# Altium PCB gY-950A20200704V1.PcbDoc (part 3 of 5)
Units mm, origin at the board's own origin, x right, y up, seen from the top; angles counter-clockwise.
Board outline 59.48 x 100.3 mm, 2 copper layers (Top Layer, Bottom Layer), stack 0.193 mm thick; 144 components, 124 nets, 550 pads, 234 vias.
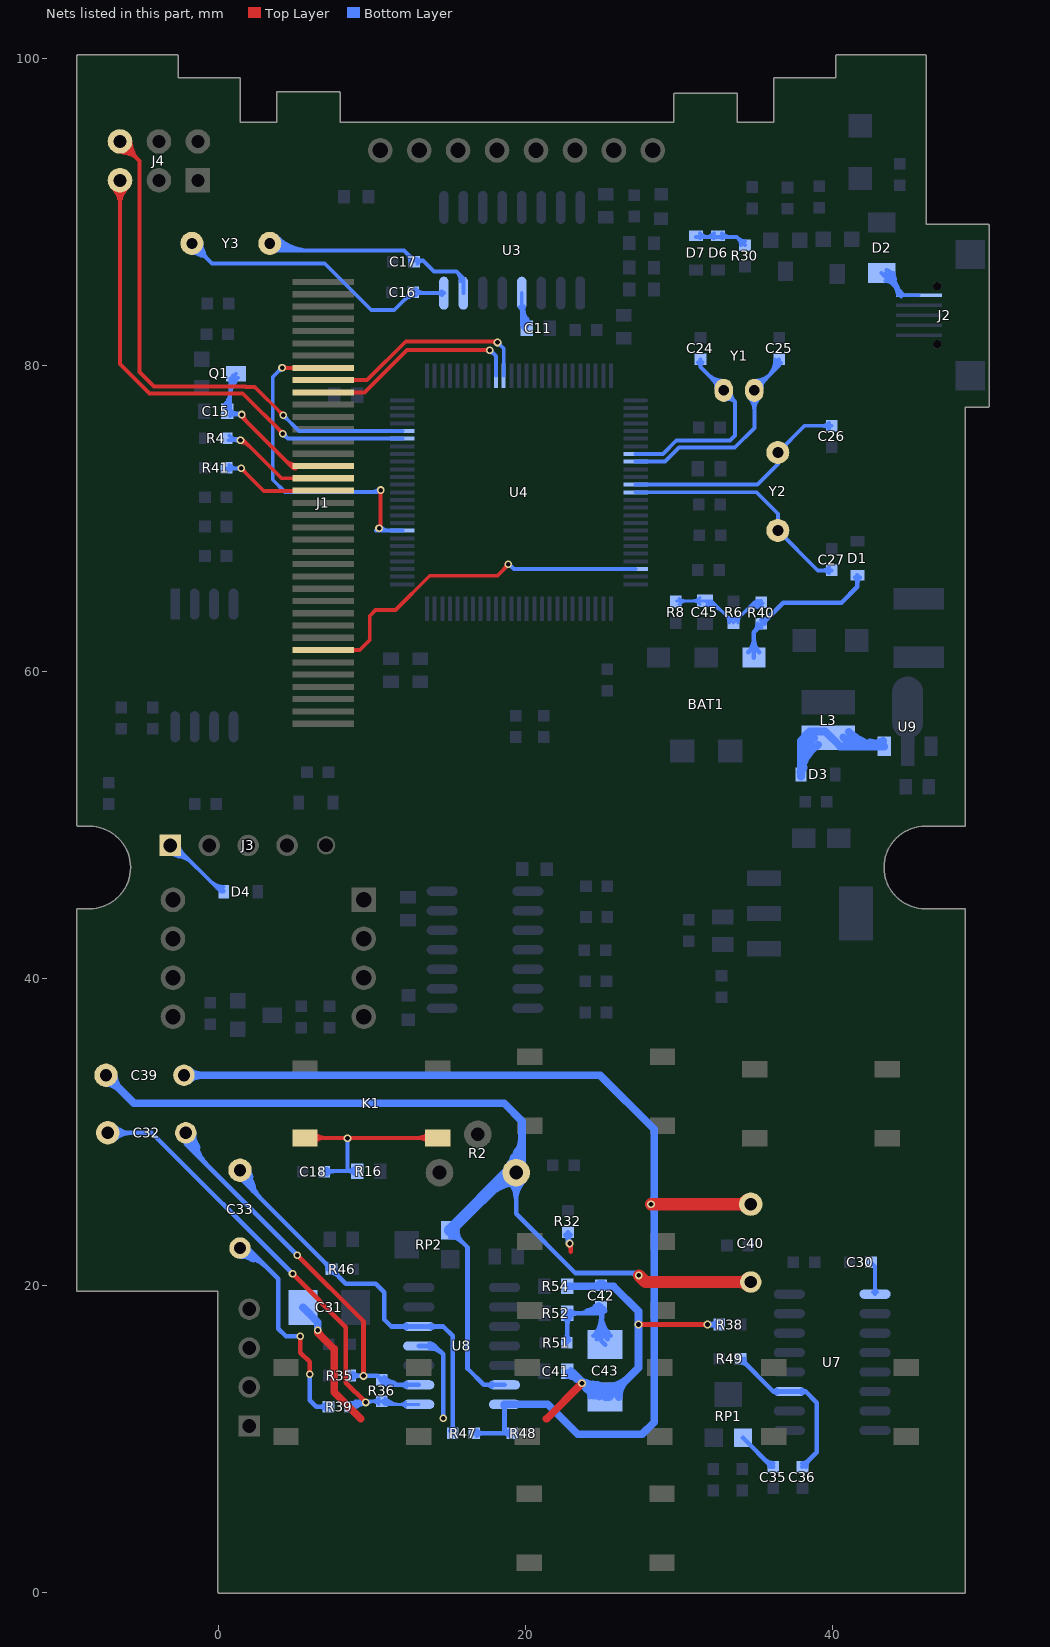
[diagram p3: the nets of this part, all layers, seen from the top]

## Via types
v1: diameter 0.5, hole 0.3, Top Layer to Bottom Layer, tented both sides, 234 vias

## Nets (pads, with @x,y where several pads share a name; then routed paths per layer and width w, separated by ;. In a path a pad name is that pad's centre, name@x,y a point inside that pad or via, vN(x,y) a via of type N, cw(c..) or ccw(c..) an arc to the next point about the centre after c; other vN are vias at no path point) (continued)
LCD_RD: J1.10 U4.85 | length 15.8
  Top Layer w0.25: J1.10@6.807,78.225 9.493,78.225 12.255,80.988 17.64,80.988 17.653,81.001 v1(17.653,80.975) ; 17.321,80.988 cw(c17.321,80.643) 17.565,80.887 ccw(c17.321,80.643) 17.321,80.988 ; 17.382,80.988 ccw(c17.382,81.246) 17.565,81.064 cw(c17.382,81.246) 17.382,80.988
  Bottom Layer w0.25: v1(17.653,80.975) 17.653,81.001 18.066,80.587 U4.85@18.066,79.312 ; v1@17.653,80.85 cw(c17.653,80.487) 17.91,80.744 ccw(c17.653,80.487) v1@17.653,80.85 ; v1@17.778,80.975 ccw(c18.018,80.975) 17.848,80.805 cw(c18.018,80.975) v1@17.778,80.975
LCD_RESET: J1.31 U4.23 | length 25.1
  Top Layer w0.25: J1.31@6.807,61.425 9.177,61.425 9.83,62.078 9.83,63.652 10.211,64.033 11.506,64.033 13.741,66.269 18.161,66.269 v1@18.923,67.031 ; 18.623,66.73 ccw(c18.323,67.031) 18.747,67.031 cw(c18.323,67.031) 18.623,66.73
  Bottom Layer w0.25: v1@18.923,67.031 19.241,66.712 U4.23@27.166,66.712 ; v1@18.872,66.906 cw(c18.872,66.481) 19.172,66.781 ccw(c18.872,66.481) v1@18.872,66.906
  other v1: 18.872,67.031
LCD_RS: J1.8 U4.58 | length 25.6
  Top Layer w0.25: v1(4.115,79.832) 4.122,79.825 J1.8@6.807,79.825 ; v1(10.439,69.367) 10.541,69.469 v1(10.541,71.857) ; v1@10.453,71.768 cw(c10.239,71.555) 10.541,71.555 cw(c10.843,71.555) v1@10.629,71.768 ; v1@4.203,79.744 cw(c4.4,79.547) 4.4,79.825 ccw(c4.4,79.547) v1@4.203,79.744 ; v1@4.203,79.921 ccw(c4.433,80.151) 4.433,79.825 cw(c4.433,80.151) v1@4.203,79.921
  Bottom Layer w0.25: v1(4.115,79.832) 3.505,79.223 3.505,72.534 4.31,71.73 10.414,71.73 v1(10.541,71.857) ; 9.933,71.73 ccw(c9.933,72.465) v1@10.453,71.945 ; 10.239,69.212 v1@10.439,69.212 ; v1(10.439,69.367) 10.595,69.212 U4.58@11.966,69.212 ; v1@10.528,69.456 ccw(c11.116,70.044) 11.116,69.212 ; 3.901,79.619 cw(c4.115,79.405) 4.115,79.707 ccw(c4.115,79.405) 3.901,79.619 ; 3.901,79.619 ccw(c3.688,79.832) 3.99,79.832 cw(c3.688,79.832) 3.901,79.619
LCD_WR: J1.9 U4.86 | length 16.6
  Top Layer w0.25: J1.9@6.807,79.025 9.652,79.025 12.18,81.553 18.091,81.553 v1(18.161,81.483) ; 17.69,81.553 cw(c17.69,81.012) 18.073,81.395 ccw(c17.69,81.012) 17.69,81.553
  Bottom Layer w0.25: v1(18.161,81.483) 18.566,81.078 U4.86@18.566,79.312 ; 18.374,81.27 cw(c18.588,81.483) 18.286,81.483 ccw(c18.588,81.483) 18.374,81.27 ; 18.374,81.27 ccw(c18.161,81.056) 18.161,81.358 cw(c18.161,81.056) 18.374,81.27
MCU_DM-: J4.5 U4.70 | length 42.6
  Top Layer w0.25: J4.5@-6.452,92.05 -6.452,80.086 -4.521,78.156 1.549,78.156 v1(4.166,75.54) ; -6.452,90.42 cw(c-4.822,90.42) -5.974,91.572 ccw(c-4.822,90.42) -6.452,90.42 ; -6.452,90.42 ccw(c-8.081,90.42) -6.929,91.572 cw(c-8.081,90.42) -6.452,90.42 ; -6.452,91.024 cw(c-5.426,91.024) -6.151,91.749 ccw(c-5.426,91.024) -6.452,91.024 ; -6.452,91.024 ccw(c-7.478,91.024) -6.752,91.749 cw(c-7.478,91.024) -6.452,91.024 ; 3.952,75.753 cw(c3.739,75.54) 4.041,75.54 ccw(c3.739,75.54) 3.952,75.753 ; 3.952,75.753 ccw(c4.166,75.966) 4.166,75.665 cw(c4.166,75.966) 3.952,75.753
  Bottom Layer w0.25: v1(4.166,75.54) 4.493,75.212 U4.70@11.966,75.212 ; 4.379,75.326 cw(c4.592,75.54) 4.291,75.54 ccw(c4.592,75.54) 4.379,75.326 ; 4.379,75.326 ccw(c4.166,75.113) 4.166,75.415 cw(c4.166,75.113) 4.379,75.326
MCU_DP+: J4.6 U4.71 | length 49.1
  Top Layer w0.25: J4.6@-6.77,94.524 ccw(c-5.872,94.708) -6.109,93.823 ; J4.6@-6.525,94.575 ccw(c-5.429,94.799) -5.718,93.718 ; J4.6@-6.452,94.59 -5.182,93.32 -5.182,79.553 -4.238,78.609 1.737,78.609 1.759,78.588 2.337,78.588 v1(4.191,76.733) ; J4.6@-6.437,94.663 cw(c-6.661,93.567) -5.58,93.856 ; J4.6@-6.386,94.908 cw(c-6.57,94.01) -5.685,94.247 ; -5.726,93.864 cw(c-5.001,94.59) -6.027,94.59 ccw(c-5.001,94.59) -5.726,93.864 ; -5.726,93.864 ccw(c-6.452,93.139) -6.452,94.165 cw(c-6.452,93.139) -5.726,93.864 ; -5.299,93.437 cw(c-4.147,94.59) -5.777,94.59 ccw(c-4.147,94.59) -5.299,93.437 ; -5.299,93.437 ccw(c-6.452,92.285) -6.452,93.915 cw(c-6.452,92.285) -5.299,93.437 ; 3.978,76.947 cw(c3.764,76.733) 4.066,76.733 ccw(c3.764,76.733) 3.978,76.947 ; 3.978,76.947 ccw(c4.191,77.16) 4.191,76.858 cw(c4.191,77.16) 3.978,76.947
  Bottom Layer w0.25: v1@4.14,76.784 v1(4.191,76.733) 5.212,75.712 U4.71@11.966,75.712 ; 4.404,76.52 cw(c4.618,76.733) 4.316,76.733 ccw(c4.618,76.733) 4.404,76.52 ; 4.404,76.52 ccw(c4.191,76.307) 4.191,76.608 cw(c4.191,76.307) 4.404,76.52
MGND: C31.2 C41.1 C42.1 C43.2 R32.1 R38.2 R54.1 U8.11 | length 108.4
  Top Layer w0.3: 22.936,22.2 v1@22.936,22.657 ; v1(27.356,17.45) v1(31.852,17.45) ; v1@22.789,22.662 cw(c22.435,22.308) 22.936,22.308 ccw(c22.435,22.308) v1@22.789,22.662
  Top Layer w0.5: 9.246,11.303 7.515,13.034 7.515,15.85 6.452,16.913 v1(6.452,17.069) ; 21.361,11.303 v1(23.673,13.614) ; v1(6.452,17.069) ccw(c6.829,17.069) 6.562,16.802 cw(c6.829,17.069) v1(6.452,17.069)
  Bottom Layer w0.3: U8.11@13.03,16.053 14.076,16.053 ; U8.11@13.875,16.13 ccw(c14.641,16.572) 14.412,15.718 ; v1(14.63,11.328) 14.63,15.499 14.076,16.053 ; R32.1@22.643,23.27 cw(c22.474,22.978) 22.8,23.065 ; C41.1@22.679,14.295 ccw(c23.155,14.456) C41.1@23.025,13.971 ; C41.1@22.687,14.28 ccw(c23.247,14.765) 23.194,14.027 ; v1@22.758,22.835 R32.1@22.758,23.47 ; v1@22.785,22.799 ccw(c22.642,22.924) 22.806,23.019 ; 22.808,23.034 cw(c23.035,23.095) R32.1@22.896,23.284 ; 23.239,13.831 cw(c23.092,13.279) v1@23.586,13.564 ; 23.357,13.981 ccw(c23.855,14.26) v1@23.7,13.711 ; 23.386,13.978 ccw(c23.852,14.207) v1@23.702,13.71 ; 23.457,14.048 ccw(c24.008,14.196) v1@23.723,13.701 ; v1@23.623,13.528 cw(c23.337,13.033) 23.889,13.181 ; v1@23.647,13.518 cw(c23.502,12.975) 23.988,13.256 ; v1@23.648,13.517 cw(c23.513,12.984) 23.989,13.259 ; v1@23.701,13.519 cw(c23.981,12.586) C43.2@24.443,13.443 ; v1@23.753,13.674 ccw(c23.904,13.784) 23.961,13.607 ; v1@23.769,13.643 ccw(c24.06,13.73) 23.916,13.463 ; v1@23.782,13.799 cw(c23.335,11.914) C43.2@25.077,12.764 ; v1@23.844,13.461 ccw(c24.24,13.858) C43.2@24.548,13.389 ; 23.892,13.475 cw(c23.6,12.243) C43.2@24.798,12.655 ; 23.905,13.4 cw(c23.225,12.72) C43.2@24.187,12.72 ; 23.957,13.396 cw(c24.159,13.745) v1@23.769,13.64 ; C43.2@24.104,13.2 ccw(c24.447,13.543) C43.2@24.713,13.138 ; C43.2@24.339,13.636 cw(c24.419,12.09) C43.2@25.455,13.24 ; C43.2@24.399,13.653 cw(c24.072,12.273) C43.2@25.346,12.895 ; C43.2@25.177,12.72 24.411,12.72 C41.1@22.72,14.41 ; v1(31.852,17.45) R38.2@32.614,17.45 ; 14.076,16.053 cw(c14.076,16.338) 13.859,16.153 ccw(c14.076,16.338) 14.076,16.053 ; 14.076,16.053 ccw(c14.076,15.768) 13.859,15.952 cw(c14.076,15.768) 14.076,16.053 ; 22.715,23.074 ccw(c23.119,23.182) v1@22.91,22.82 ; 22.715,23.074 ccw(c23.119,23.182) v1@22.91,22.82 ; 22.715,23.074 ccw(c23.119,23.182) v1@22.91,22.82 ; C41.1@22.72,14.41 ccw(c24.875,16.564) 24.963,13.519 cw(c24.875,16.564) C41.1@22.72,14.41 ; C41.1@22.72,14.41 23.131,14.41 ; v1@22.758,22.912 cw(c23.316,22.912) 22.922,23.306 ccw(c23.316,22.912) v1@22.758,22.912 ; v1@22.758,22.912 ccw(c22.201,22.912) 22.595,23.306 cw(c22.201,22.912) v1@22.758,22.912 ; 23.131,14.41 cw(c23.131,14.611) 22.951,14.523 ccw(c23.131,14.611) 23.131,14.41 ; 23.131,14.41 ccw(c23.131,14.21) 22.951,14.298 cw(c23.131,14.21) 23.131,14.41 ; 23.131,14.41 v1@23.8,13.741 ; 23.198,14.089 cw(c22.795,13.391) v1@23.576,13.59 ; 23.198,14.089 cw(c22.795,13.391) v1@23.576,13.59 ; 23.198,14.089 cw(c22.795,13.391) v1@23.576,13.59 ; 23.285,14.028 cw(c22.907,13.462) v1@23.575,13.595 ; 23.285,14.028 cw(c22.907,13.462) v1@23.575,13.595 ; 23.285,14.028 cw(c22.907,13.462) v1@23.575,13.595 ; 23.37,13.795 ccw(c23.613,14.105) v1@23.661,13.714 ; 23.37,13.795 ccw(c23.613,14.105) v1@23.661,13.714 ; 23.37,13.795 ccw(c23.613,14.105) v1@23.661,13.714 ; v1@23.727,13.531 cw(c24.126,12.916) C43.2@24.279,13.633 ; v1@23.727,13.531 cw(c24.126,12.916) C43.2@24.279,13.633 ; v1@23.727,13.531 cw(c24.126,12.916) C43.2@24.279,13.633 ; v1@23.761,13.662 ccw(c24.125,13.857) 24.006,13.462 ; v1@23.761,13.662 ccw(c24.125,13.857) 24.006,13.462 ; v1@23.761,13.662 ccw(c24.125,13.857) 24.006,13.462 ; v1@23.769,13.64 ccw(c24.487,13.833) C43.2@24.115,13.189 ; v1@23.769,13.64 ccw(c24.487,13.833) C43.2@24.115,13.189 ; v1@23.769,13.64 ccw(c24.487,13.833) C43.2@24.115,13.189 ; v1@23.8,13.741 ccw(c22.987,12.929) 22.769,14.057 cw(c22.987,12.929) v1@23.8,13.741 ; C43.2@24.187,12.72 ccw(c23.645,12.72) 24.028,13.103 cw(c23.645,12.72) C43.2@24.187,12.72 ; v1@31.902,17.363 cw(c32.113,16.998) 32.222,17.405 ; v1@31.902,17.363 cw(c32.113,16.998) 32.222,17.405 ; v1@31.902,17.363 cw(c32.113,16.998) 32.222,17.405 ; v1@31.902,17.536 ccw(c32.113,17.902) 32.222,17.494 ; v1@31.902,17.536 ccw(c32.113,17.902) 32.222,17.494 ; v1@31.902,17.536 ccw(c32.113,17.902) 32.222,17.494 ; v1@32.056,17.45 cw(c32.056,16.892) 32.45,17.286 ccw(c32.056,16.892) v1@32.056,17.45 ; v1@32.056,17.45 ccw(c32.056,18.007) 32.45,17.613 cw(c32.056,18.007) v1@32.056,17.45 ; U8.11@13.741,15.898 cw(c13.741,14.715) 14.578,15.552 ccw(c13.741,14.715) U8.11@13.741,15.898 ; U8.11@13.741,16.198 cw(c13.741,15.74) 14.065,16.064 ccw(c13.741,15.74) U8.11@13.741,16.198 ; C41.1@22.712,14.352 cw(c22.858,13.598) 23.4,14.141 ccw(c22.858,13.598) C41.1@22.712,14.352 ; C41.1@22.72,14.052 cw(c22.72,13.188) 23.332,13.799 ccw(c22.72,13.188) C41.1@22.72,14.052 ; R32.1@22.758,23.22 ccw(c23.347,23.22) 22.931,22.804 cw(c23.347,23.22) R32.1@22.758,23.22 ; C41.1@22.781,14.06 cw(c22.995,13.17) 23.472,13.951 ccw(c22.995,13.17) C41.1@22.781,14.06 ; C41.1@22.97,14.369 ccw(c23.284,14.445) 23.115,14.169 cw(c23.284,14.445) C41.1@22.97,14.369 ; C41.1@22.977,14.309 ccw(c23.351,14.309) 23.086,14.045 cw(c23.351,14.309) C41.1@22.977,14.309 ; 23.212,13.919 ccw(c24.903,15.609) 24.972,13.219 cw(c24.903,15.609) 23.212,13.919 ; 23.235,13.896 ccw(c23.673,14.333) 23.673,13.714 cw(c23.673,14.333) 23.235,13.896 ; 23.322,14.219 cw(c22.718,13.614) 23.573,13.614 ccw(c22.718,13.614) 23.322,14.219 ; v1@23.704,13.427 ccw(c24.93,14.653) 24.981,12.92 cw(c24.93,14.653) v1@23.704,13.427 ; v1@23.773,13.614 ccw(c24.392,13.614) 23.954,13.177 cw(c24.392,13.614) v1@23.773,13.614
  Bottom Layer w0.5: C31.2@5.481,18.562 6.452,17.591 v1(6.452,17.069) ; R54.1@22.72,19.948 25.722,19.948 27.356,18.313 v1(27.356,17.45) 27.356,14.63 25.445,12.72 C43.2@25.177,12.72 ; 24.439,19.948 ccw(c24.439,20.491) 24.824,20.107 cw(c24.439,20.491) 24.439,19.948 ; C42.1@25.009,20.107 ccw(c25.393,20.491) 25.393,19.948 cw(c25.393,20.491) C42.1@25.009,20.107 ; C43.2@25.367,13.42 ccw(c25.367,15.299) 26.696,13.97 cw(c25.367,15.299) C43.2@25.367,13.42 ; C43.2@26.067,12.72 cw(c27.567,12.72) 26.506,13.781 ccw(c27.567,12.72) C43.2@26.067,12.72
  other v1: 22.86,22.733
NetBAT1_1: BAT1.1 D1.1 R40.2 | length 19.2
  Bottom Layer w0.3: BAT1.1@34.873,60.935 34.873,62.584 36.805,64.516 40.589,64.516 41.631,65.557 D1.1@41.631,66.297 ; 34.873,62.142 cw(c33.666,62.142) 34.519,61.288 ccw(c33.666,62.142) 34.873,62.142 ; 34.873,62.142 ccw(c36.08,62.142) 35.226,61.288 cw(c36.08,62.142) 34.873,62.142 ; 41.631,65.814 cw(c42.113,65.814) 41.772,66.155 ccw(c42.113,65.814) 41.631,65.814 ; 41.631,65.814 ccw(c41.148,65.814) 41.489,66.155 cw(c41.148,65.814) 41.631,65.814 ; 34.909,62.62 ccw(c34.384,63.144) 35.126,63.144 cw(c34.384,63.144) 34.909,62.62 ; R40.2@35.093,62.804 cw(c35.357,62.54) 35.357,62.913 ccw(c35.357,62.54) R40.2@35.093,62.804 ; R40.2@35.357,63.375 ccw(c35.357,64.117) 35.881,63.593 cw(c35.357,64.117) R40.2@35.357,63.375 ; R40.2@35.588,63.144 cw(c35.962,63.144) 35.697,63.409 ccw(c35.962,63.144) R40.2@35.588,63.144
NetC11_2: C11.2 U3.4 | length 12.8
  Bottom Layer w0.25: C11.2@19.744,82.614 U3.4@19.744,84.696 ; 19.795,83.061 cw(c19.368,82.814) C11.2@19.82,82.619 ; 19.802,83.048 ccw(c20.301,83.336) C11.2@20.152,82.78 ; C11.2@19.85,82.672 ccw(c19.312,83.057) 19.885,83.387 ; C11.2@20.053,82.526 ccw(c19.659,82.809) 20.079,83.051 ; 19.744,83.487 cw(c20.179,83.487) 19.872,83.794 ccw(c20.179,83.487) 19.744,83.487 ; 19.744,83.487 ccw(c19.31,83.487) 19.617,83.794 cw(c19.31,83.487) 19.744,83.487 ; U3.4@19.655,83.766 cw(c19.405,83.334) 19.887,83.463 ccw(c19.405,83.334) U3.4@19.655,83.766 ; C11.2@19.744,82.787 ccw(c20.358,82.787) 19.924,82.353 cw(c20.358,82.787) C11.2@19.744,82.787 ; 19.744,83.391 ccw(c20.962,83.391) 20.101,82.53 cw(c20.962,83.391) 19.744,83.391 ; U3.4@19.744,83.994 ccw(c21.565,83.994) 20.278,82.707 cw(c21.565,83.994) U3.4@19.744,83.994 ; 19.863,83.551 cw(c20.22,83.647) 19.9,83.832 ccw(c20.22,83.647) 19.863,83.551
NetC15_1: C15.1 J1.16 Q1.D | length 28.6
  Top Layer w0.25: v1(1.48,76.779) 1.48,76.652 4.707,73.425 J1.16@6.807,73.425 ; 4.682,73.587 cw(c4.571,73.173) J1.16@4.942,73.388 ; v1@1.605,76.779 ccw(c2.213,76.779) 1.783,76.349 cw(c2.213,76.779) v1@1.605,76.779 ; 4.366,73.766 ccw(c5.007,74.407) 5.007,73.5 cw(c5.007,74.407) 4.366,73.766 ; 4.793,73.339 ccw(c5.007,73.553) 5.007,73.25 cw(c5.007,73.553) 4.793,73.339
  Bottom Layer w0.25: 0.468,77.534 ccw(c0.749,77.371) C15.1@0.547,77.117 ; 0.613,77.785 ccw(c0.931,77.601) C15.1@0.702,77.313 ; Q1.D@0.763,79.134 cw(c0.676,79.005) 0.811,78.927 cw(c1.074,78.775) Q1.D@1.028,79.075 ; Q1.D@0.771,79.129 cw(c0.561,78.797) 0.901,78.6 ; Q1.D@0.905,79.34 cw(c0.7,79.017) 1.031,78.825 ; Q1.D@1.121,79.446 0.739,79.063 0.739,76.779 v1(1.48,76.779) ; 1.178,76.779 cw(c1.178,76.478) 1.391,76.691 ccw(c1.178,76.478) 1.178,76.779 ; 1.178,76.779 ccw(c1.178,77.081) 1.391,76.868 cw(c1.178,77.081) 1.178,76.779 ; 1.183,76.857 ccw(c1.263,77.154) v1@1.417,76.888 ; 1.183,76.857 ccw(c1.263,77.154) v1@1.417,76.888 ; 1.183,76.857 ccw(c1.263,77.154) v1@1.417,76.888 ; 1.192,76.855 cw(c1.115,76.569) v1@1.371,76.717 ; 1.192,76.855 cw(c1.115,76.569) v1@1.371,76.717 ; 1.192,76.855 cw(c1.115,76.569) v1@1.371,76.717 ; C15.1@0.328,77.292 ccw(c-0.664,78.284) 0.739,78.284 cw(c-0.664,78.284) C15.1@0.328,77.292 ; C15.1@0.505,77.115 ccw(c-0.06,77.68) 0.739,77.68 cw(c-0.06,77.68) C15.1@0.505,77.115 ; C15.1@0.726,76.691 cw(c0.94,76.477) 0.94,76.779 ccw(c0.94,76.477) C15.1@0.726,76.691 ; C15.1@0.726,77.089 ccw(c1.473,77.835) 1.473,76.779 cw(c1.473,77.835) C15.1@0.726,77.089 ; 0.739,77.979 cw(c2.438,77.979) 1.236,79.18 ccw(c2.438,77.979) 0.739,77.979 ; 0.739,78.583 cw(c1.834,78.583) 1.06,79.357 ccw(c1.834,78.583) 0.739,78.583
NetC16_1: C16.1 U3.8 Y3.1@-1.765,87.943 | length 34.4
  Bottom Layer w0.25: Y3.1@-1.888,87.918 ccw(c-0.917,88.117) -1.173,87.16 ; Y3.1@-1.765,87.943 -0.448,86.627 6.896,86.627 9.931,83.591 11.428,83.591 12.674,84.837 12.814,84.696 U3.8@14.664,84.696 ; Y3.1@-1.74,88.066 cw(c-1.939,87.095) -0.982,87.351 ; C16.1@12.295,84.403 ccw(c12.157,84.92) C16.1@12.668,84.763 ; -1.125,87.303 cw(c-0.485,87.943) -1.39,87.943 ccw(c-0.485,87.943) -1.125,87.303 ; -1.125,87.303 ccw(c-1.765,86.663) -1.765,87.568 cw(c-1.765,86.663) -1.125,87.303 ; -0.698,86.877 cw(c0.369,87.943) -1.14,87.943 ccw(c0.369,87.943) -0.698,86.877 ; -0.698,86.877 ccw(c-1.765,85.81) -1.765,87.318 cw(c-1.765,85.81) -0.698,86.877 ; 14.23,84.696 cw(c14.23,84.262) 14.537,84.569 ccw(c14.23,84.262) 14.23,84.696 ; 14.23,84.696 ccw(c14.23,85.13) 14.537,84.823 cw(c14.23,85.13) 14.23,84.696 ; 12.106,84.27 cw(c12.674,83.703) 12.674,84.505 ccw(c12.674,83.703) 12.106,84.27 ; 12.29,84.454 ccw(c11.984,84.761) 12.418,84.761 cw(c11.984,84.761) 12.29,84.454 ; C16.1@12.855,84.58 cw(c13.136,84.299) 13.136,84.696 ccw(c13.136,84.299) C16.1@12.855,84.58 ; C16.1@12.855,84.942 ccw(c13.448,85.535) 13.448,84.696 cw(c13.448,85.535) C16.1@12.855,84.942
NetC17_2: C17.2 U3.7 Y3.2@3.315,87.943 | length 35.6
  Bottom Layer w0.25: Y3.2@3.315,87.943 3.781,87.478 12.065,87.478 12.726,86.816 13.312,86.816 ; Y3.2@3.601,87.702 cw(c3.999,87.366) 4.259,87.817 ; Y3.2@3.77,87.515 cw(c4.02,87.28) 4.191,87.577 cw(c4.445,88.016) Y3.2@3.939,87.984 ; Y3.2@3.792,87.54 cw(c4.231,87.17) 4.518,87.667 ; U3.7@15.934,84.696 15.934,85.666 15.486,86.114 14.014,86.114 13.312,86.816 ; 13.312,86.816 ccw(c13.312,86.391) 12.946,86.609 cw(c13.312,86.391) 13.312,86.816 ; Y3.2@3.226,87.855 ccw(c4.138,88.766) 4.138,87.478 cw(c4.138,88.766) Y3.2@3.226,87.855 ; Y3.2@3.403,88.032 ccw(c4.741,89.37) 4.741,87.478 cw(c4.741,89.37) Y3.2@3.403,88.032 ; Y3.2@3.58,88.209 ccw(c5.345,89.973) 5.345,87.478 cw(c5.345,89.973) Y3.2@3.58,88.209 ; Y3.2@3.757,88.385 ccw(c5.948,90.577) 5.948,87.478 cw(c5.948,90.577) Y3.2@3.757,88.385 ; 12.235,87.307 cw(c11.668,86.74) 12.47,86.74 ccw(c11.668,86.74) 12.235,87.307 ; 12.419,87.123 ccw(c12.726,87.43) 12.726,86.996 cw(c12.726,87.43) 12.419,87.123 ; C17.2@12.907,86.921 ccw(c13.16,87.174) 13.16,86.816 cw(c13.16,87.174) C17.2@12.907,86.921 ; 15.49,86.11 cw(c14.851,85.471) 15.755,85.471 ccw(c14.851,85.471) 15.49,86.11
NetC18_1: C18.1 K1.3 K1.4 R16.1 | length 25.5
  Top Layer w0.254: K1.3@5.614,29.622 K1.4@14.264,29.622 ; 6.91,29.622 cw(c6.91,30.643) 6.188,29.921 ccw(c6.91,30.643) 6.91,29.622 ; 6.91,29.622 ccw(c6.91,28.601) 6.188,29.323 cw(c6.91,28.601) 6.91,29.622 ; 12.968,29.622 cw(c12.968,28.601) 13.69,29.323 ccw(c12.968,28.601) 12.968,29.622 ; 12.968,29.622 ccw(c12.968,30.643) 13.69,29.921 cw(c12.968,30.643) 12.968,29.622 ; 8.01,29.622 cw(c8.01,29.219) 8.295,29.504 ccw(c8.01,29.219) 8.01,29.622 ; v1@8.469,29.504 cw(c8.754,29.219) 8.754,29.622 ccw(c8.754,29.219) v1@8.469,29.504
  Bottom Layer w0.254: C18.1@6.898,27.449 R16.1@9.03,27.449 ; 8.382,27.5 v1(8.382,29.591) ; 8.355,27.449 cw(c8.355,26.774) 8.832,27.251 ccw(c8.355,26.774) 8.355,27.449 ; 8.355,27.449 ccw(c8.355,28.123) 8.832,27.646 cw(c8.355,28.123) 8.355,27.449 ; 8.382,29.294 cw(c8.679,29.294) 8.469,29.504 ccw(c8.679,29.294) 8.382,29.294 ; 8.382,29.294 ccw(c8.085,29.294) 8.295,29.504 cw(c8.085,29.294) 8.382,29.294 ; C18.1@7.037,27.228 cw(c7.57,26.695) 7.57,27.449 ccw(c7.57,26.695) C18.1@7.037,27.228 ; C18.1@7.037,27.587 ccw(c7.371,27.921) 7.371,27.449 cw(c7.371,27.921) C18.1@7.037,27.587
NetC24_2: C24.2 U4.8 Y1.1 | length 21.9
  Bottom Layer w0.25: U4.8@27.166,74.212 28.949,74.212 29.82,75.082 33.325,75.082 33.655,75.413 33.655,77.613 ; C24.2@31.393,80.39 31.393,79.875 ; 31.393,79.875 cw(c31.784,79.875) 31.548,80.186 ccw(c31.784,79.875) 31.393,79.875 ; 31.393,79.875 ccw(c31.003,79.875) 31.239,80.186 cw(c31.003,79.875) 31.393,79.875 ; 31.393,79.875 Y1.1@32.909,78.359 33.655,77.613 ; 33.655,77.613 ccw(c33.238,77.196) 33.055,77.757 cw(c33.238,77.196) 33.655,77.613 ; 31.842,79.426 ccw(c32.909,80.493) 32.909,78.984 cw(c32.909,80.493) 31.842,79.426 ; 32.204,79.064 cw(c31.649,78.509) 32.434,78.509 ccw(c31.649,78.509) 32.204,79.064 ; 32.269,78.999 ccw(c32.909,79.639) 32.909,78.734 cw(c32.909,79.639) 32.269,78.999 ; Y1.1@33.384,78.209 ccw(c34.169,78.209) 33.614,77.654 cw(c34.169,78.209) Y1.1@33.384,78.209
NetC25_2: C25.2 U4.9 Y1.2 | length 28.3
  Bottom Layer w0.25: U4.9@27.166,73.712 29.09,73.712 30.007,74.629 33.634,74.629 34.909,75.905 Y1.2@34.909,78.359 36.524,79.974 ; C25.2@36.314,80.244 cw(c35.945,79.987) 36.379,79.871 cw(c36.794,79.76) C25.2@36.625,80.155 ; C25.2@36.524,80.39 36.524,79.974 ; 34.909,77.062 cw(c36.056,77.062) 35.245,77.873 ccw(c36.056,77.062) 34.909,77.062 ; 34.909,77.062 ccw(c33.762,77.062) 34.573,77.873 cw(c33.762,77.062) 34.909,77.062 ; 36.524,79.974 cw(c36.734,79.974) 36.639,80.161 ccw(c36.734,79.974) 36.524,79.974 ; 36.524,79.974 ccw(c36.315,79.974) 36.409,80.161 cw(c36.315,79.974) 36.524,79.974 ; Y1.2@34.909,78.734 ccw(c34.909,79.639) 35.549,78.999 cw(c34.909,79.639) Y1.2@34.909,78.734 ; Y1.2@34.909,78.984 ccw(c34.909,80.493) 35.976,79.426 cw(c34.909,80.493) Y1.2@34.909,78.984 ; Y1.2@35.384,78.509 cw(c36.169,78.509) 35.614,79.064 ccw(c36.169,78.509) Y1.2@35.384,78.509 ; 35.793,79.243 ccw(c34.646,80.39) 36.268,80.39 cw(c34.646,80.39) 35.793,79.243 ; 36.22,79.67 ccw(c35.5,80.39) 36.518,80.39 cw(c35.5,80.39) 36.22,79.67
NetC26_2: C26.2 U4.12 Y2.2@36.44,74.308 | length 17.3
  Bottom Layer w0.25: U4.12@27.166,72.212 35.103,72.212 36.441,73.55 ; Y2.2@36.129,74.234 cw(c35.534,73.55) 36.441,73.55 ; Y2.2@36.752,74.234 ccw(c37.347,73.55) 36.441,73.55 ; C26.2@39.772,75.868 ccw(c39.335,75.431) 39.335,76.049 ccw(c39.335,76.667) C26.2@39.772,76.23 ; C26.2@39.953,76.049 38.181,76.049 Y2.2@36.44,74.308 36.441,73.55
NetC27_2: C27.2 U4.13 Y2.1@36.44,69.228 | length 16.5
  Bottom Layer w0.25: U4.13@27.166,71.712 35.044,71.712 36.441,70.316 36.441,69.228 39.045,66.623 C27.2@39.953,66.623 ; C27.2@39.772,66.442 ccw(c39.335,66.005) 39.335,66.623 ccw(c39.335,67.241) C27.2@39.772,66.804
NetC30_2: C30.2 U7.1 | length 3.6
  Bottom Layer w0.25: C30.2@42.521,21.513 42.781,21.253 U7.1@42.781,19.431 ; 42.781,19.865 cw(c42.347,19.865) 42.653,19.558 ccw(c42.347,19.865) 42.781,19.865 ; 42.781,19.865 ccw(c43.215,19.865) 42.908,19.558 cw(c43.215,19.865) 42.781,19.865
NetC32_1: C32.1 R36.1 R39.2 U8.8 | length 60.2
  Top Layer w0.3: v1(4.801,20.752) 8.28,17.272 8.28,13.665 v1(9.576,12.37)
  Bottom Layer w0.203: R39.2@8.534,12.09 8.89,12.446 R36.1@10.617,12.446 10.82,12.243 U8.8@13.03,12.243 ; R39.2@8.582,12.15 ccw(c8.861,12.502) 9.098,12.121 ; R39.2@8.646,12.347 ccw(c8.882,12.891) 9.178,12.377 ; R39.2@8.708,12.309 ccw(c9.051,12.743) 9.343,12.274 ; R39.2@8.804,12.018 cw(c9.213,11.909) 9.001,12.275 ; 9.185,12.226 ccw(c9.056,12.647) v1@9.445,12.44 ; 9.296,12.259 cw(c9.376,11.995) v1@9.506,12.239 ; R36.1@10.678,12.4 cw(c10.933,12.205) 11.093,12.483 ; R36.1@10.827,12.261 cw(c10.947,12.155) 11.028,12.294 cw(c11.166,12.533) R36.1@10.893,12.49 ; R36.1@10.839,12.276 cw(c11.118,12.064) 11.293,12.367 ; 9.04,12.302 cw(c9.197,11.714) v1@9.502,12.241 ; 9.04,12.302 cw(c9.197,11.714) v1@9.502,12.241 ; 9.04,12.302 cw(c9.197,11.714) v1@9.502,12.241 ; 9.233,12.196 cw(c9.422,11.848) v1@9.534,12.227 ; 9.233,12.196 cw(c9.422,11.848) v1@9.534,12.227 ; 9.233,12.196 cw(c9.422,11.848) v1@9.534,12.227 ; 9.279,12.221 ccw(c9.125,12.503) v1@9.433,12.412 ; 9.279,12.221 ccw(c9.125,12.503) v1@9.433,12.412 ; 9.279,12.221 ccw(c9.125,12.503) v1@9.433,12.412 ; v1@9.666,12.488 ccw(c9.862,12.744) 9.905,12.424 ; v1@9.666,12.488 ccw(c9.862,12.744) 9.905,12.424 ; v1@9.666,12.488 ccw(c9.862,12.744) 9.905,12.424 ; v1@9.694,12.28 cw(c10.006,12.041) 9.954,12.431 ; v1@9.694,12.28 cw(c10.006,12.041) 9.954,12.431 ; v1@9.694,12.28 cw(c10.006,12.041) 9.954,12.431 ; 9.943,12.446 cw(c9.943,11.771) 10.42,12.248 ccw(c9.943,11.771) 9.943,12.446 ; 9.943,12.446 ccw(c9.943,13.121) 10.42,12.644 cw(c9.943,13.121) 9.943,12.446 ; 11.828,12.243 cw(c11.828,11.752) 12.175,12.099 ccw(c11.828,11.752) 11.828,12.243 ; 11.828,12.243 ccw(c11.828,12.733) 12.175,12.386 cw(c11.828,12.733) 11.828,12.243 ; R39.2@8.445,12.18 cw(c9.086,11.539) 9.086,12.446 ccw(c9.086,11.539) R39.2@8.445,12.18 ; R39.2@8.588,12.037 cw(c9.577,11.048) 9.577,12.446 ccw(c9.577,11.048) R39.2@8.588,12.037 ; R39.2@8.732,11.893 cw(c10.067,10.557) 10.067,12.446 ccw(c10.067,10.557) R39.2@8.732,11.893 ; 9.034,12.446 cw(c9.034,11.828) 9.471,12.265 ccw(c9.034,11.828) 9.034,12.446 ; v1@9.681,12.265 cw(c10.118,11.828) 10.118,12.446 ccw(c10.118,11.828) v1@9.681,12.265 ; R36.1@10.671,12.5 ccw(c11.292,13.121) 11.292,12.243 cw(c11.292,13.121) R36.1@10.671,12.5 ; R36.1@10.815,12.644 ccw(c11.782,13.611) 11.782,12.243 cw(c11.782,13.611) R36.1@10.815,12.644
  Bottom Layer w0.3: C32.1@-7.244,29.948 -4.396,29.948 v1(4.801,20.752) ; -5.767,29.948 cw(c-5.767,31.426) -6.812,30.381 ccw(c-5.767,31.426) -5.767,29.948 ; -5.767,29.948 ccw(c-5.767,28.471) -6.812,29.515 cw(c-5.767,28.471) -5.767,29.948
NetC32_2: C32.2 R35.1 R36.2 U8.9 | length 49.9
  Top Layer w0.3: v1(5.105,21.971) 9.423,17.653 v1(9.423,14.097)
  Bottom Layer w0.3: C32.2@-2.268,29.721 cw(c-2.726,28.718) -1.661,29.003 ; C32.2@-2.218,29.401 cw(c-2.24,29.177) -2.023,29.235 cw(c-1.841,29.284) C32.2@-1.924,29.454 ; C32.2@-2.164,29.948 -2.164,29.241 ; C32.2@-2.139,29.992 cw(c-2.986,28.525) -1.351,28.963 ; -1.738,29.291 cw(c-1.252,29.422) C32.2@-1.688,29.673 ; v1(5.105,21.971) -2.164,29.241 ; R35.1@8.56,14.122 10.338,14.122 R36.2@10.617,13.843 10.947,13.513 U8.9@13.03,13.513 ; R36.2@10.677,13.62 cw(c10.762,13.301) R36.2@10.927,13.587 ; R36.2@10.729,13.641 cw(c11.071,13.023) 11.424,13.635 ; R36.2@10.848,13.844 ccw(c11.217,13.845) 11.032,13.526 ; -2.164,29.241 cw(c-1.985,29.241) -2.029,29.415 ccw(c-1.985,29.241) -2.164,29.241 ; -2.164,29.241 ccw(c-2.344,29.241) -2.3,29.415 cw(c-2.344,29.241) -2.164,29.241 ; 9.117,14.122 cw(c9.117,14.68) 8.723,14.286 ccw(c9.117,14.68) 9.117,14.122 ; 9.117,14.122 ccw(c9.117,13.565) 8.723,13.959 cw(c9.117,13.565) 9.117,14.122 ; 11.945,13.513 cw(c11.945,13.139) 12.21,13.403 ccw(c11.945,13.139) 11.945,13.513 ; 11.945,13.513 ccw(c11.945,13.886) 12.21,13.622 cw(c11.945,13.886) 11.945,13.513 ; C32.2@-2.214,29.948 ccw(c-0.627,29.948) -1.75,28.826 cw(c-0.627,29.948) C32.2@-2.214,29.948 ; C32.2@-1.914,29.948 ccw(c0.397,29.948) -1.237,28.314 cw(c0.397,29.948) C32.2@-1.914,29.948 ; C32.2@-1.614,29.948 ccw(c1.421,29.948) -0.725,27.802 cw(c1.421,29.948) C32.2@-1.614,29.948 ; 9.121,14.122 cw(c9.121,13.794) 9.353,14.026 ccw(c9.121,13.794) 9.121,14.122 ; v1@9.494,14.026 cw(c9.726,13.794) 9.726,14.122 ccw(c9.726,13.794) v1@9.494,14.026 ; R36.2@10.568,13.794 ccw(c11.248,14.474) 11.248,13.513 cw(c11.248,14.474) R36.2@10.568,13.794 ; R36.2@10.781,14.006 ccw(c11.972,15.198) 11.972,13.513 cw(c11.972,15.198) R36.2@10.781,14.006
NetC33_1: C33.1 R46.1 R47.2 U8.12 | length 46.5
  Bottom Layer w0.3: C33.1@1.289,27.213 cw(c1.034,26.307) 1.943,26.551 ; C33.1@1.368,27.503 cw(c0.679,26) 2.276,26.428 ; C33.1@1.373,27.514 1.373,27.024 R46.1@7.341,21.057 8.28,20.117 10.211,20.117 10.77,19.558 10.77,17.78 11.227,17.323 U8.12@13.03,17.323 14.63,17.323 15.24,16.713 R47.2@15.24,10.363 ; C33.1@1.493,27.775 cw(c1.024,26.753) 2.111,27.044 ; 1.858,26.867 cw(c2.292,26.983) C33.1@1.903,27.208 ; 6.946,21.451 cw(c6.552,21.057) 7.11,21.057 ccw(c6.552,21.057) 6.946,21.451 ; 6.946,21.451 ccw(c7.341,21.845) 7.341,21.288 cw(c7.341,21.845) 6.946,21.451 ; 7.735,20.662 cw(c8.129,21.057) 7.572,21.057 ccw(c8.129,21.057) 7.735,20.662 ; 7.735,20.662 ccw(c7.341,20.268) 7.341,20.826 cw(c7.341,20.268) 7.735,20.662 ; 11.945,17.323 cw(c11.945,16.949) 12.21,17.213 ccw(c11.945,16.949) 11.945,17.323 ; 11.945,17.323 ccw(c11.945,17.696) 12.21,17.432 cw(c11.945,17.696) 11.945,17.323 ; 14.115,17.323 cw(c14.115,17.696) 13.851,17.432 ccw(c14.115,17.696) 14.115,17.323 ; 14.115,17.323 ccw(c14.115,16.949) 13.851,17.213 cw(c14.115,16.949) 14.115,17.323 ; 15.24,10.921 cw(c14.682,10.921) 15.077,10.527 ccw(c14.682,10.921) 15.24,10.921 ; 15.24,10.921 ccw(c15.798,10.921) 15.403,10.527 cw(c15.798,10.921) 15.24,10.921 ; C33.1@1.385,27.514 ccw(c2.596,27.514) 1.74,26.657 cw(c2.596,27.514) C33.1@1.385,27.514 ; C33.1@1.685,27.514 ccw(c3.62,27.514) 2.252,26.145 cw(c3.62,27.514) C33.1@1.685,27.514 ; C33.1@1.985,27.514 ccw(c4.645,27.514) 2.764,25.633 cw(c4.645,27.514) C33.1@1.985,27.514
NetC33_2: C33.2 R39.1 | length 26.8
  Top Layer w0.3: v1(5.309,16.688) 5.309,15.621 5.918,15.011 v1(5.918,14.199)
  Bottom Layer w0.3: C33.2@1.328,22.412 ccw(c2.633,23.05) 2.257,21.647 ; C33.2@1.373,22.434 1.874,22.434 3.873,20.434 3.873,17.183 4.369,16.688 v1(5.309,16.688) ; C33.2@1.613,22.506 ccw(c2.367,22.733) 2.163,21.972 ; C33.2@1.648,21.957 cw(c1.9,21.521) 2.03,22.008 ; v1(5.918,14.199) 5.918,12.522 6.35,12.09 R39.1@7.137,12.09 ; 6.58,12.09 cw(c6.58,11.533) 6.974,11.927 ccw(c6.58,11.533) 6.58,12.09 ; 6.58,12.09 ccw(c6.58,12.648) 6.974,12.254 cw(c6.58,12.648) 6.58,12.09 ; C33.2@1.373,21.884 cw(c1.373,19.346) 3.167,21.14 ccw(c1.373,19.346) C33.2@1.373,21.884 ; C33.2@1.373,22.184 cw(c1.373,20.371) 2.655,21.653 ccw(c1.373,20.371) C33.2@1.373,22.184 ; C33.2@1.373,22.484 cw(c1.373,21.395) 2.143,22.165 ccw(c1.373,21.395) C33.2@1.373,22.484
NetC35_2: C35.2 RP1.1 | length 4.5
  Bottom Layer w0.3: RP1.1@34.167,10.061 36.048,8.18 C35.2@36.145,8.18 ; 35.586,8.643 ccw(c36.145,9.202) 36.145,8.411 cw(c36.145,9.202) 35.586,8.643 ; C35.2@35.819,8.409 cw(c35.59,8.18) 35.914,8.18 ccw(c35.59,8.18) C35.2@35.819,8.409
NetC36_2: C36.2 R49.2 U7.11 | length 16.3
  Bottom Layer w0.3: R49.2@34.011,15.215 36.144,13.081 ; C36.2@38.044,8.18 38.989,9.125 38.989,12.344 38.252,13.081 ; 34.405,14.82 cw(c34.799,15.215) 34.242,15.215 ccw(c34.799,15.215) 34.405,14.82 ; 34.405,14.82 ccw(c34.011,14.426) 34.011,14.984 cw(c34.011,14.426) 34.405,14.82 ; 36.144,13.081 cw(c36.144,12.791) 36.364,12.98 ccw(c36.144,12.791) 36.144,13.081 ; 36.144,13.081 ccw(c36.144,13.371) 36.364,13.182 cw(c36.144,13.371) 36.144,13.081 ; 36.144,13.081 U7.11@37.193,13.081 38.252,13.081 ; 38.252,13.081 cw(c38.252,13.396) 38.019,13.185 ccw(c38.252,13.396) 38.252,13.081 ; 38.252,13.081 ccw(c38.252,12.766) 38.019,12.977 cw(c38.252,12.766) 38.252,13.081 ; 38.438,8.574 cw(c38.044,8.968) 38.044,8.411 ccw(c38.044,8.968) 38.438,8.574 ; 38.438,8.574 ccw(c38.833,8.18) 38.275,8.18 cw(c38.833,8.18) 38.438,8.574
NetC39_1: C39.1 C40.2 R2.1 RP2.1 U8.6 | length 104.7
  Top Layer w0.8: v1(27.381,20.65) 27.812,20.219 C40.2@34.677,20.219 ; 33.953,20.219 cw(c33.953,19.495) 34.465,20.007 ccw(c33.953,19.495) 33.953,20.219 ; 33.953,20.219 ccw(c33.953,20.943) 34.465,20.431 cw(c33.953,20.943) 33.953,20.219
  Bottom Layer w0.3: RP2.1@15.085,23.601 16.205,22.48 16.205,14.58 17.272,13.513 U8.6@18.618,13.513 ; R2.1@19.38,27.559 19.38,24.663 23.235,20.809 27.223,20.809 v1(27.381,20.65) ; 27.008,20.754 ccw(c27.186,21.063) v1@27.339,20.741 ; 15.853,22.832 cw(c16.621,23.601) 15.535,23.601 ccw(c16.621,23.601) 15.853,22.832 ; 15.853,22.832 ccw(c15.085,22.064) 15.085,23.151 cw(c15.085,22.064) 15.853,22.832 ; 17.533,13.513 cw(c17.533,13.139) 17.798,13.403 ccw(c17.533,13.139) 17.533,13.513 ; 17.533,13.513 ccw(c17.533,13.886) 17.798,13.622 cw(c17.533,13.886) 17.533,13.513 ; 19.38,25.545 cw(c21.191,25.545) 19.911,26.825 ccw(c21.191,25.545) 19.38,25.545 ; 19.38,25.545 ccw(c17.57,25.545) 18.85,26.825 cw(c17.57,25.545) 19.38,25.545 ; 19.38,26.269 cw(c20.467,26.269) 19.698,27.038 ccw(c20.467,26.269) 19.38,26.269 ; 19.38,26.269 ccw(c18.294,26.269) 19.062,27.038 cw(c18.294,26.269) 19.38,26.269 ; 26.757,20.809 cw(c26.757,20.026) 27.31,20.579 ccw(c26.757,20.026) 26.757,20.809
  Bottom Layer w0.5: C39.1@-7.364,33.703 -5.538,31.877 18.593,31.877 19.761,30.709 R2.1@19.761,27.559 ; 19.229,28.35 ccw(c19.78,28.032) R2.1@19.457,27.485 ; 19.482,28.788 ccw(c20.038,28.467) R2.1@19.711,27.915 ; -6.49,32.829 cw(c-5.616,33.703) -6.852,33.703 ccw(c-5.616,33.703) -6.49,32.829 ; -6.49,32.829 ccw(c-7.364,31.955) -7.364,33.191 cw(c-7.364,31.955) -6.49,32.829 ; R2.1@18.921,27.815 ccw(c16.891,29.845) 19.761,29.845 cw(c16.891,29.845) R2.1@18.921,27.815 ; R2.1@19.274,27.462 ccw(c18.098,28.638) 19.761,28.638 cw(c18.098,28.638) R2.1@19.274,27.462
  Bottom Layer w0.8: RP2.1@15.085,23.601 19.043,27.559 R2.1@19.761,27.559 ; 17.604,26.12 cw(c19.38,24.345) 19.38,26.856 ccw(c19.38,24.345) 17.604,26.12
NetC39_2: C39.2 C40.1 R47.1 R48.2 U8.7 | length 86.7
  Top Layer w0.8: v1(28.169,25.299) C40.1@34.677,25.299 ; 33.803,25.299 cw(c33.803,24.425) 34.421,25.043 ccw(c33.803,24.425) 33.803,25.299 ; 33.803,25.299 ccw(c33.803,26.173) 34.421,25.555 cw(c33.803,26.173) 33.803,25.299
  Bottom Layer w0.3: R47.1@16.637,10.363 18.694,10.363 ; U8.7@18.618,12.243 18.618,10.439 18.694,10.363 ; 17.195,10.363 cw(c17.195,10.921) 16.8,10.527 ccw(c17.195,10.921) 17.195,10.363 ; 17.195,10.363 ccw(c17.195,9.806) 16.8,10.2 cw(c17.195,9.806) 17.195,10.363 ; 18.569,10.363 cw(c18.569,9.806) 18.963,10.2 ccw(c18.569,9.806) 18.569,10.363 ; 18.569,10.363 ccw(c18.569,10.921) 18.963,10.527 cw(c18.569,10.921) 18.569,10.363 ; 18.618,11.869 cw(c18.992,11.869) 18.728,12.133 ccw(c18.992,11.869) 18.618,11.869 ; 18.618,11.869 ccw(c18.244,11.869) 18.509,12.133 cw(c18.244,11.869) 18.618,11.869 ; 18.694,10.363 cw(c18.694,10.075) 18.934,10.235 ccw(c18.694,10.075) 18.694,10.363 ; 18.694,10.363 ccw(c18.694,10.651) 18.934,10.491 cw(c18.694,10.651) 18.694,10.363
  Bottom Layer w0.5: C39.2@-2.284,33.703 24.844,33.703 28.372,30.175 28.372,11.074 27.584,10.287 23.393,10.287 21.438,12.243 U8.7@18.618,12.243 ; -1.197,33.703 cw(c-1.197,34.789) -1.966,34.021 ccw(c-1.197,34.789) -1.197,33.703 ; -1.197,33.703 ccw(c-1.197,32.616) -1.966,33.384 cw(c-1.197,32.616) -1.197,33.703 ; v1(28.169,25.299) cw(c27.68,24.81) 28.372,24.81 ccw(c27.68,24.81) v1(28.169,25.299) ; v1(28.169,25.299) ccw(c27.68,25.788) 28.372,25.788 cw(c27.68,25.788) v1(28.169,25.299)
NetC42_2: C42.2 C43.1 R51.2 R52.2 | length 34.4
  Bottom Layer w0.3: R51.2@22.682,16.256 22.72,16.294 R52.2@22.72,18.178 24.679,18.178 ; 23.942,18.312 cw(c24.486,17.369) C42.2@24.841,18.399 ; 24.334,18.204 ccw(c23.95,18.868) C42.2@24.693,18.675 ; 24.512,18.641 cw(c24.77,18.194) C42.2@24.939,18.682 ; C42.2@24.606,18.361 cw(c24.771,18.075) C42.2@24.857,18.394 ; C43.1@25.177,16.14 24.916,16.4 24.916,18.415 24.679,18.178 ; 22.72,17.457 cw(c23.339,17.457) 22.902,17.895 ccw(c23.339,17.457) 22.72,17.457 ; 22.72,17.457 ccw(c22.101,17.457) 22.539,17.895 cw(c22.101,17.457) 22.72,17.457 ; 23.339,18.178 cw(c23.339,18.797) 22.902,18.359 ccw(c23.339,18.797) 23.339,18.178 ; 23.339,18.178 ccw(c23.339,17.559) 22.902,17.996 cw(c23.339,17.559) 23.339,18.178 ; 24.679,18.178 ccw(c24.494,18.363) 24.718,18.498 cw(c24.494,18.363) 24.679,18.178 ; 24.916,18.06 cw(c25.474,18.06) 25.08,18.454 ccw(c25.474,18.06) 24.916,18.06 ; 24.916,18.06 ccw(c24.359,18.06) 24.753,18.454 cw(c24.359,18.06) 24.916,18.06 ; R51.2@22.519,16.419 ccw(c22.033,16.905) 22.72,16.905 cw(c22.033,16.905) R51.2@22.519,16.419 ; 22.72,16.722 ccw(c23.148,16.722) 22.846,16.419 cw(c23.148,16.722) 22.72,16.722 ; 23.298,18.178 ccw(c23.298,20.236) 24.753,18.781 cw(c23.298,20.236) 23.298,18.178 ; 24.022,18.178 ccw(c24.022,19.512) 24.965,18.568 cw(c24.022,19.512) 24.022,18.178 ; C43.1@24.421,16.705 ccw(c23.225,17.901) 24.916,17.901 cw(c23.225,17.901) C43.1@24.421,16.705 ; C43.1@24.633,16.493 ccw(c23.949,17.177) 24.916,17.177 cw(c23.949,17.177) C43.1@24.633,16.493 ; 24.746,18.178 ccw(c24.746,18.787) 25.177,18.356 cw(c24.746,18.787) 24.746,18.178 ; 24.916,17.517 ccw(c26.364,17.517) 25.34,16.493 cw(c26.364,17.517) 24.916,17.517 ; C42.2@24.916,18.241 ccw(c27.088,18.241) 25.552,16.705 cw(c27.088,18.241) C42.2@24.916,18.241 ; 24.995,17.87 cw(c25.803,18.042) 25.11,18.491 ccw(c25.803,18.042) 24.995,17.87
NetC45_1: C45.1 R6.2 R8.2 R40.1 | length 28.5
  Bottom Layer w0.203: R8.2@29.832,64.63 C45.1@31.691,64.63 32.118,64.63 R6.2@33.553,63.195 34.9,64.541 ; C45.1@31.945,64.366 cw(c32.145,64.019) 32.249,64.406 ; 34.62,64.064 ccw(c34.334,65.132) R40.1@35.291,64.579 ; 34.896,64.342 cw(c35.005,63.933) R40.1@35.217,64.299 ; R40.1@35.093,64.191 ccw(c34.934,64.785) R40.1@35.467,64.478 ; R40.1@35.357,64.541 34.9,64.541 ; 30.853,64.63 cw(c30.853,63.895) 31.373,64.415 ccw(c30.853,63.895) 30.853,64.63 ; 30.853,64.63 ccw(c30.853,65.366) 31.373,64.846 cw(c30.853,65.366) 30.853,64.63 ; 33.076,63.672 cw(c32.599,63.195) 33.274,63.195 ccw(c32.599,63.195) 33.076,63.672 ; 33.076,63.672 ccw(c33.553,64.149) R6.2@33.553,63.475 ; 33.076,63.672 ccw(c33.553,64.149) R6.2@33.553,63.475 ; R6.2@33.553,63.475 ccw(c33.553,64.149) 34.03,63.672 ; R6.2@33.553,63.475 ccw(c33.553,64.149) 34.03,63.672 ; 34.03,63.672 ccw(c34.507,63.195) 33.833,63.195 cw(c34.507,63.195) 34.03,63.672 ; 34.9,64.541 cw(c34.9,64.307) 35.108,64.414 ccw(c34.9,64.307) 34.9,64.541 ; 34.9,64.541 ccw(c34.9,64.776) 35.108,64.669 cw(c34.9,64.776) 34.9,64.541 ; R8.2@29.992,64.395 cw(c30.561,63.825) 30.561,64.63 ccw(c30.561,63.825) R8.2@29.992,64.395 ; R8.2@29.992,64.79 ccw(c30.377,65.175) 30.377,64.63 cw(c30.377,65.175) R8.2@29.992,64.79 ; C45.1@31.792,64.326 cw(c31.792,62.803) 32.869,63.88 ccw(c31.792,62.803) C45.1@31.792,64.326 ; C45.1@31.792,64.529 cw(c31.792,63.496) 32.522,64.226 ccw(c31.792,63.496) C45.1@31.792,64.529 ; 34.099,63.741 cw(c35.357,62.484) 35.357,64.262 ccw(c35.357,62.484) 34.099,63.741 ; 34.446,64.088 cw(c35.357,63.177) 35.357,64.465 ccw(c35.357,63.177) 34.446,64.088 ; 34.793,64.435 cw(c35.357,63.871) 35.357,64.668 ccw(c35.357,63.871) 34.793,64.435
NetD2_A: D2.A J2.5 | length 15.1
  Bottom Layer w0.25: D2.A@43.205,86.004 44.653,84.556 J2.5@45.629,84.556 ; D2.A@43.447,85.981 cw(c43.029,84.832) 44.21,85.148 ; D2.A@43.532,86.216 cw(c43.229,85.383) D2.A@44.085,85.612 ; J2.5@44.254,84.556 ccw(c43.598,84.813) 44.185,85.201 cw(c43.598,84.813) J2.5@44.254,84.556 ; J2.5@44.254,84.556 ccw(c43.288,84.556) 43.971,85.239 cw(c43.288,84.556) J2.5@44.254,84.556 ; D2.A@43.455,85.479 cw(c43.455,84.815) 43.925,85.285 ccw(c43.455,84.815) D2.A@43.455,85.479 ; D2.A@43.73,86.004 ccw(c44.998,86.004) 44.102,85.108 cw(c44.998,86.004) D2.A@43.73,86.004 ; D2.A@43.98,86.004 ccw(c45.851,86.004) 44.528,84.681 cw(c45.851,86.004) D2.A@43.98,86.004 ; 44.398,84.812 cw(c44.142,84.556) 44.504,84.556 ccw(c44.142,84.556) 44.398,84.812 ; 44.451,84.798 cw(c44.147,84.598) 44.486,84.465 ccw(c44.147,84.598) 44.451,84.798
NetD3_1: D3.1 L3.2 U9.3 | length 31.6
  Bottom Layer w0.508: D3.1@37.95,53.315 37.95,55.502 38.569,56.12 39.522,56.12 40.499,55.143 U9.3@43.383,55.143 ; L3.2@40.935,55.233 cw(c41.258,54.634) 41.598,55.223 cw(c41.987,55.898) L3.2@41.216,55.789 ; D3.1@37.902,53.498 ccw(c37.681,53.881) 38.108,53.766 cw(c37.681,53.881) D3.1@37.902,53.498 ; D3.1@37.95,53.177 cw(c40.436,53.177) 39.075,55.257 ccw(c40.436,53.177) D3.1@37.95,53.177 ; 37.95,54.116 cw(c39.821,54.116) 38.796,55.682 ccw(c39.821,54.116) 37.95,54.116 ; 37.95,55.056 cw(c39.206,55.056) 38.518,56.107 ccw(c39.206,55.056) 37.95,55.056 ; L3.2@40.702,55.74 ccw(c42.144,57.182) 42.144,55.143 cw(c42.144,57.182) L3.2@40.702,55.74 ; L3.2@41.062,56.1 ccw(c43.37,58.408) 43.37,55.143 cw(c43.37,58.408) L3.2@41.062,56.1 ; 42.451,55.39 ccw(c42.739,56.463) 43.294,55.501 cw(c42.739,56.463) 42.451,55.39
NetD4_1: D4.1 J3.1 | length 16.6
  Bottom Layer w0.25: J3.1@-3.339,48.627 ccw(c-2.331,48.999) -2.609,47.961 ; J3.1@-3.105,48.714 ccw(c-1.776,49.204) -2.143,47.836 ; J3.1@-2.892,48.688 0.127,45.669 D4.1@0.305,45.669 ; J3.1@-2.887,48.19 cw(c-2.729,47.916) J3.1@-2.647,48.221 ; J3.1@-3.175,48.113 cw(c-3.175,46.04) -1.71,47.506 ccw(c-3.175,46.04) J3.1@-3.175,48.113 ; J3.1@-3.175,48.363 cw(c-3.175,46.894) -2.136,47.933 ccw(c-3.175,46.894) J3.1@-3.175,48.363 ; J3.1@-2.6,48.688 ccw(c-1.896,48.688) -2.394,48.19 cw(c-1.896,48.688) J3.1@-2.6,48.688 ; -0.554,46.35 ccw(c0.305,47.208) 0.305,45.994 cw(c0.305,47.208) -0.554,46.35 ; -0.127,45.923 ccw(c0.305,46.355) 0.305,45.744 cw(c0.305,46.355) -0.127,45.923
NetD6_2: D6.2 D7.2 R30.2 | length 10.5
  Bottom Layer w0.25: D7.2@31.096,88.359 33.766,88.359 R30.2@34.296,87.828 ; 33.859,88.265 cw(c33.422,87.828) 34.04,87.828 ccw(c33.422,87.828) 33.859,88.265 ; 33.859,88.265 ccw(c34.296,88.702) 34.296,88.084 cw(c34.296,88.702) 33.859,88.265 ; D7.2@31.355,88.276 cw(c31.555,88.076) 31.555,88.359 ccw(c31.555,88.076) D7.2@31.355,88.276 ; D7.2@31.355,88.595 ccw(c31.923,89.163) 31.923,88.359 cw(c31.923,89.163) D7.2@31.355,88.595 ; 31.717,88.359 ccw(c31.717,89.163) 32.285,88.595 cw(c31.717,89.163) 31.717,88.359 ; 32.084,88.359 cw(c32.084,88.076) 32.285,88.276 ccw(c32.084,88.076) 32.084,88.359 ; D6.2@32.803,88.276 cw(c33.003,88.076) 33.003,88.359 ccw(c33.003,88.076) D6.2@32.803,88.276 ; D6.2@32.803,88.595 ccw(c33.371,89.163) 33.371,88.359 cw(c33.371,89.163) D6.2@32.803,88.595
NetJ1_17: J1.17 R4.2 | length 12.5
  Top Layer w0.25: v1(1.403,75.103) 1.607,75.103 4.084,72.625 J1.17@6.807,72.625 ; v1@1.403,74.978 cw(c1.403,74.186) 1.964,74.746 ccw(c1.403,74.186) v1@1.403,74.978
  Bottom Layer w0.25: R4.2@0.616,75.103 v1(1.403,75.103) ; 1.102,75.103 cw(c1.102,74.801) 1.315,75.015 ccw(c1.102,74.801) 1.102,75.103 ; 1.102,75.103 ccw(c1.102,75.405) 1.315,75.191 cw(c1.102,75.405) 1.102,75.103 ; 1.112,75.181 cw(c1.034,74.89) v1@1.295,75.041 ; 1.112,75.181 ccw(c1.19,75.473) v1@1.341,75.211 ; 1.112,75.181 ccw(c1.19,75.473) v1@1.341,75.211 ; 1.112,75.181 cw(c1.034,74.89) v1@1.295,75.041 ; 1.112,75.181 ccw(c1.19,75.473) v1@1.341,75.211 ; 1.112,75.181 cw(c1.034,74.89) v1@1.295,75.041 ; v1(1.403,75.103) cw(c1.403,76.13) 0.671,75.41 ccw(c1.403,76.13) v1(1.403,75.103)
NetJ1_18: J1.18 R41.2 | length 10.9
  Top Layer w0.25: v1(1.454,73.274) 2.923,71.806 J1.18@6.621,71.806 ; 1.667,73.061 cw(c1.881,73.274) 1.579,73.274 ccw(c1.881,73.274) 1.667,73.061 ; 1.667,73.061 ccw(c1.454,72.847) 1.454,73.149 cw(c1.454,72.847) 1.667,73.061 ; 4.779,71.806 ccw(c4.779,72.053) 4.954,71.878 cw(c4.779,72.053) 4.779,71.806
  Bottom Layer w0.25: R41.2@0.527,73.274 v1(1.454,73.274) ; 1.152,73.274 cw(c1.152,72.972) 1.366,73.186 ccw(c1.152,72.972) 1.152,73.274 ; 1.152,73.274 ccw(c1.152,73.576) 1.366,73.363 cw(c1.152,73.576) 1.152,73.274 ; R41.2@0.67,73.131 cw(c1.015,72.786) 1.015,73.274 ccw(c1.015,72.786) R41.2@0.67,73.131 ; R41.2@0.67,73.493 ccw(c1.199,74.022) 1.199,73.274 cw(c1.199,74.022) R41.2@0.67,73.493